# Altium PCB Oscilloscope_O.P.PcbDoc (part 1 of 2)
Units mm, origin at the board's own origin, x right, y up, seen from the top; angles counter-clockwise.
Board outline 97.16 x 92.08 mm, 4 copper layers (L1 (Sig), L2 (GND), L3 (GND), L4 (Sig)), stack 1.589 mm thick; 119 components, 103 nets, 464 pads, 437 vias.
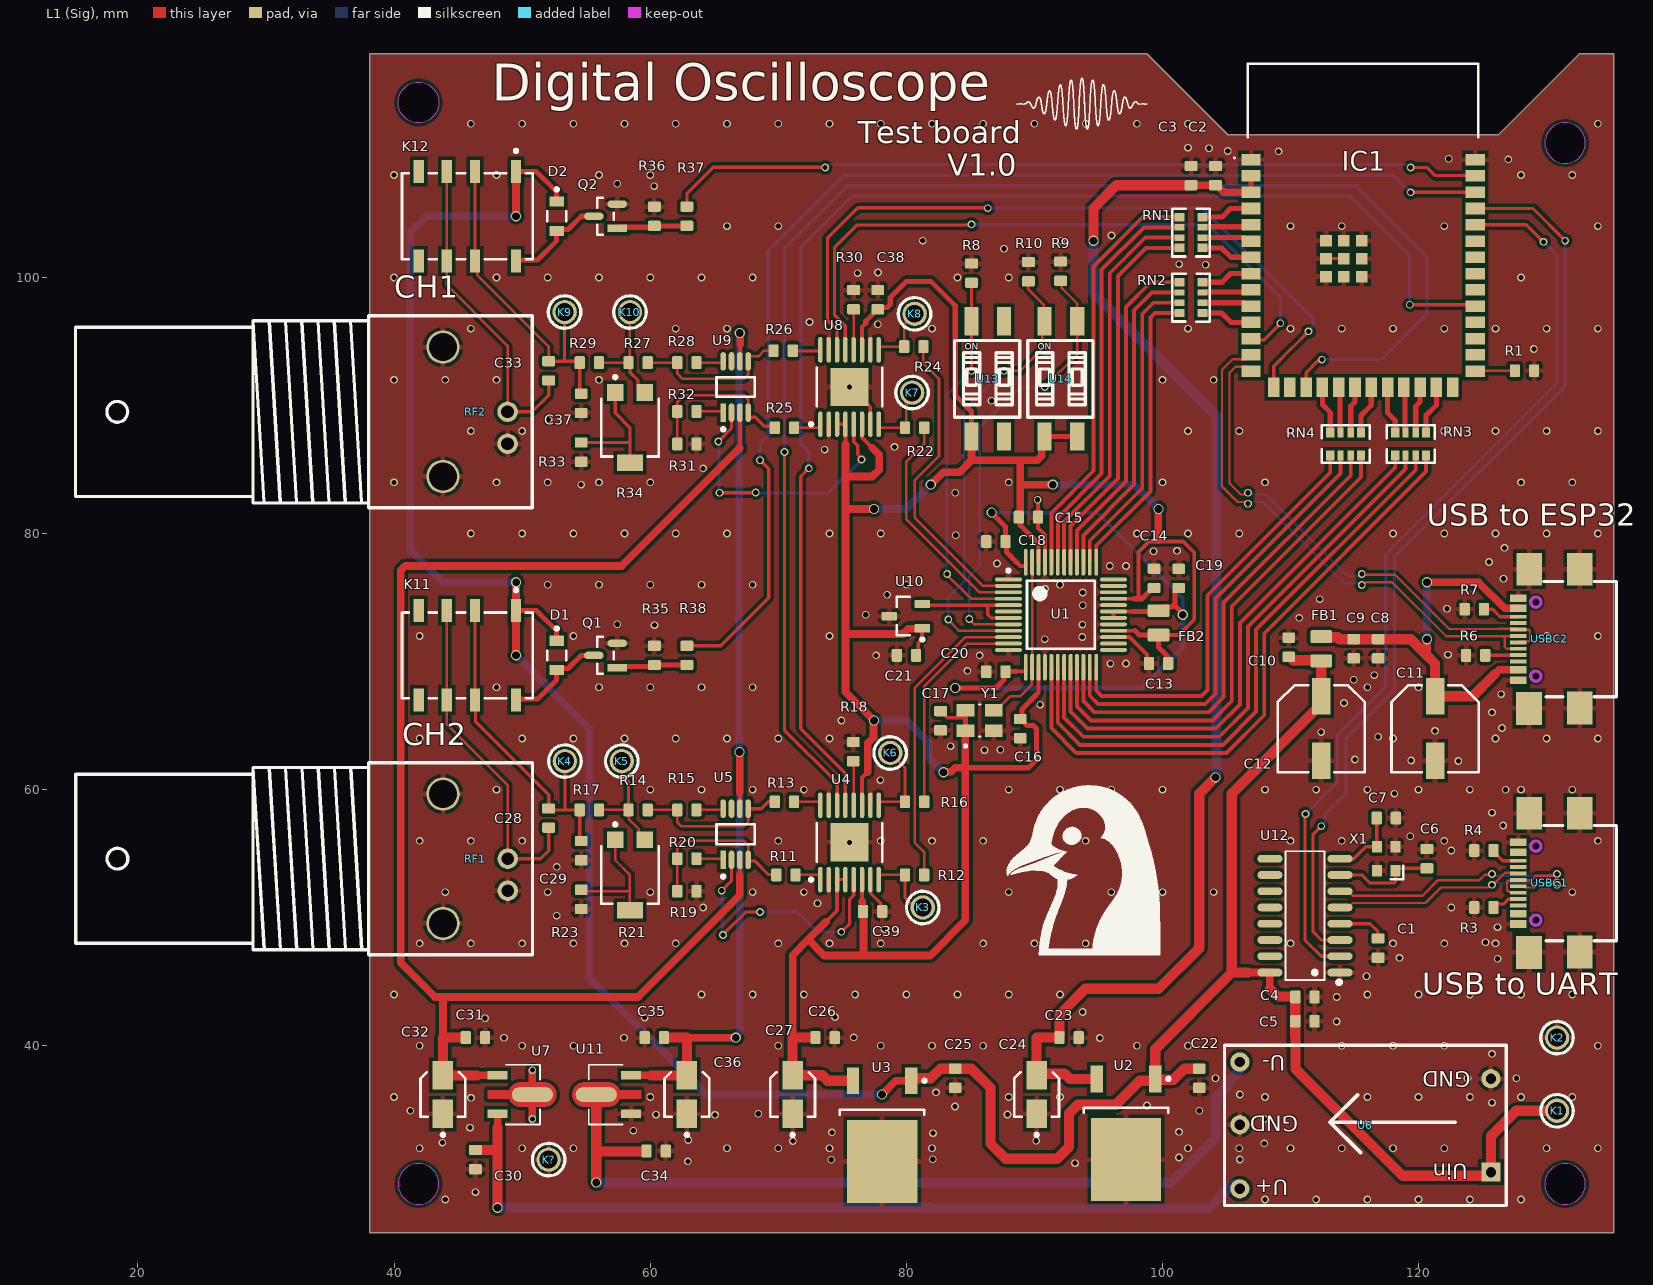
[diagram p0: L1 (Sig) view]
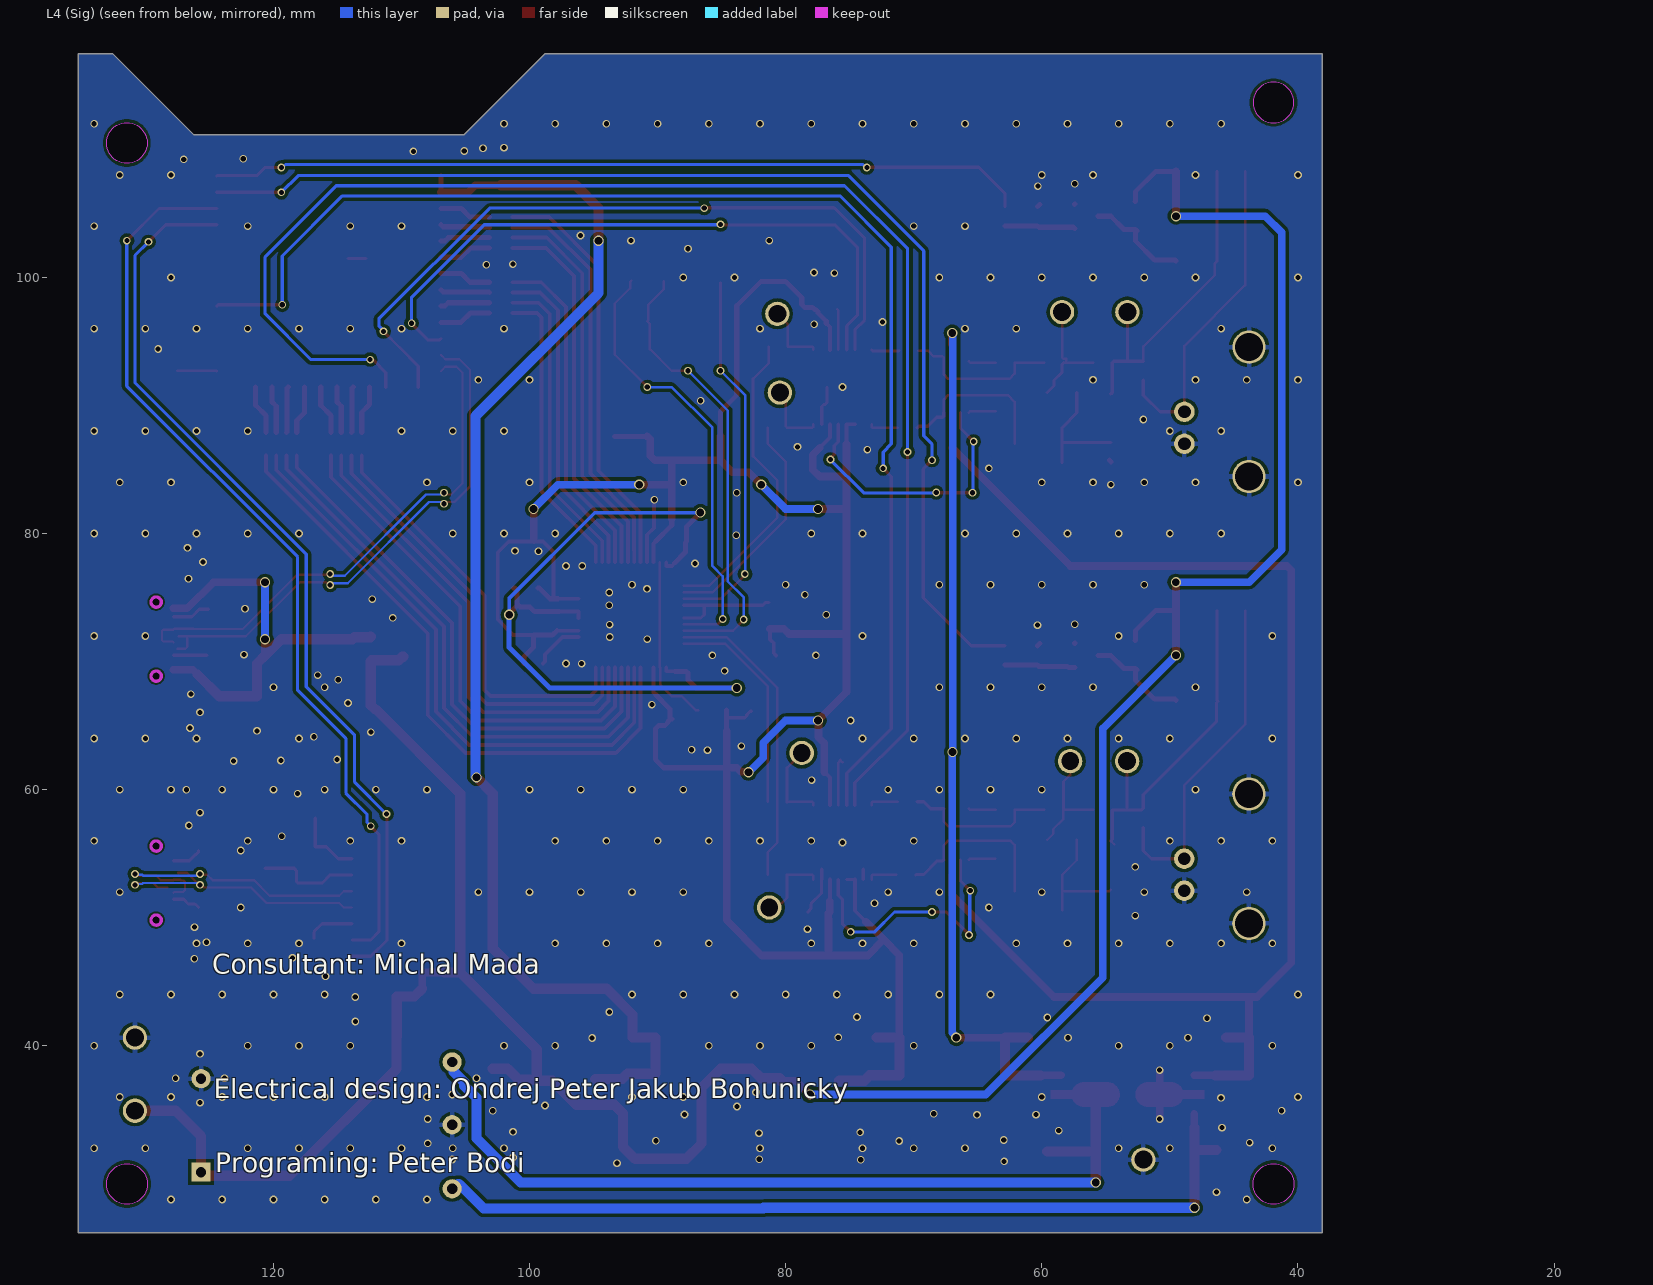
[diagram p1: L4 (Sig) view, seen from below]
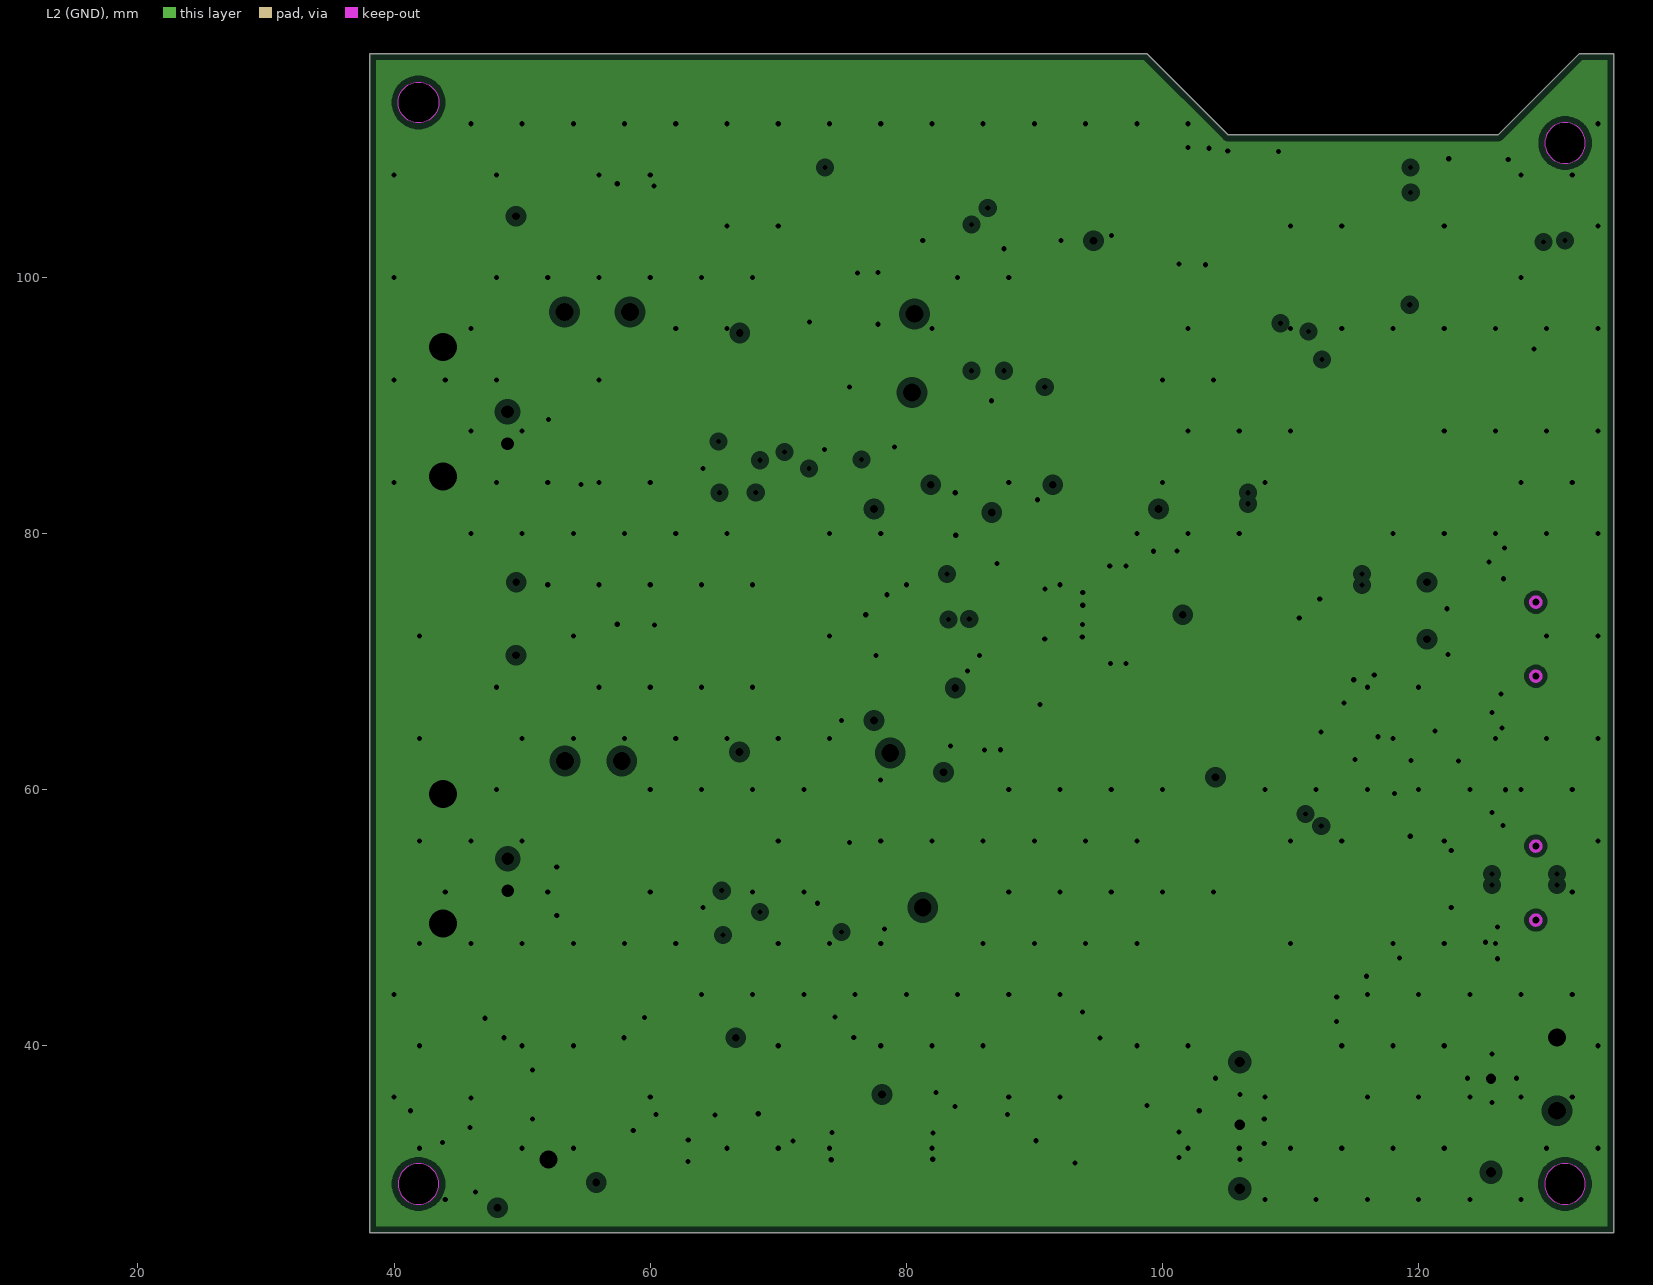
[diagram p2: L2 (GND), clearances drawn from the general rule]
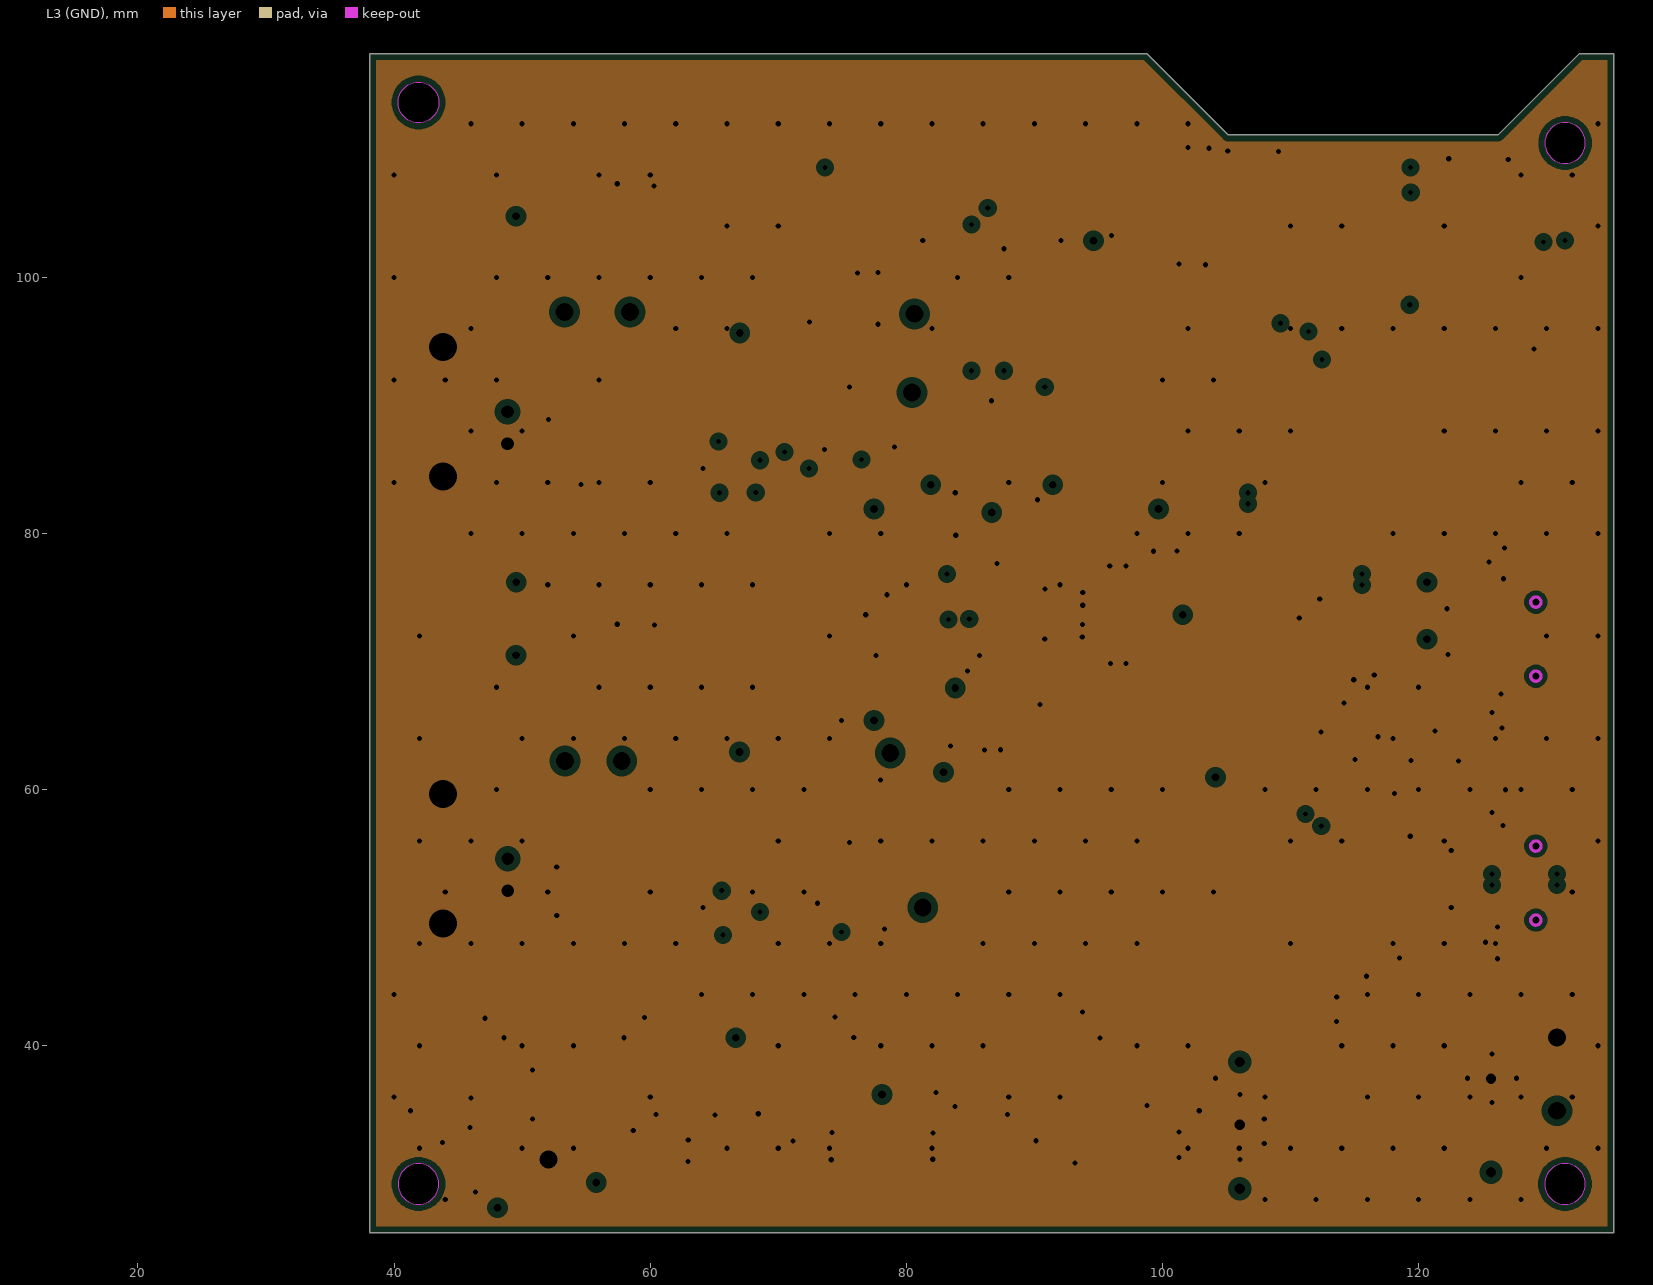
[diagram p3: L3 (GND), clearances drawn from the general rule]
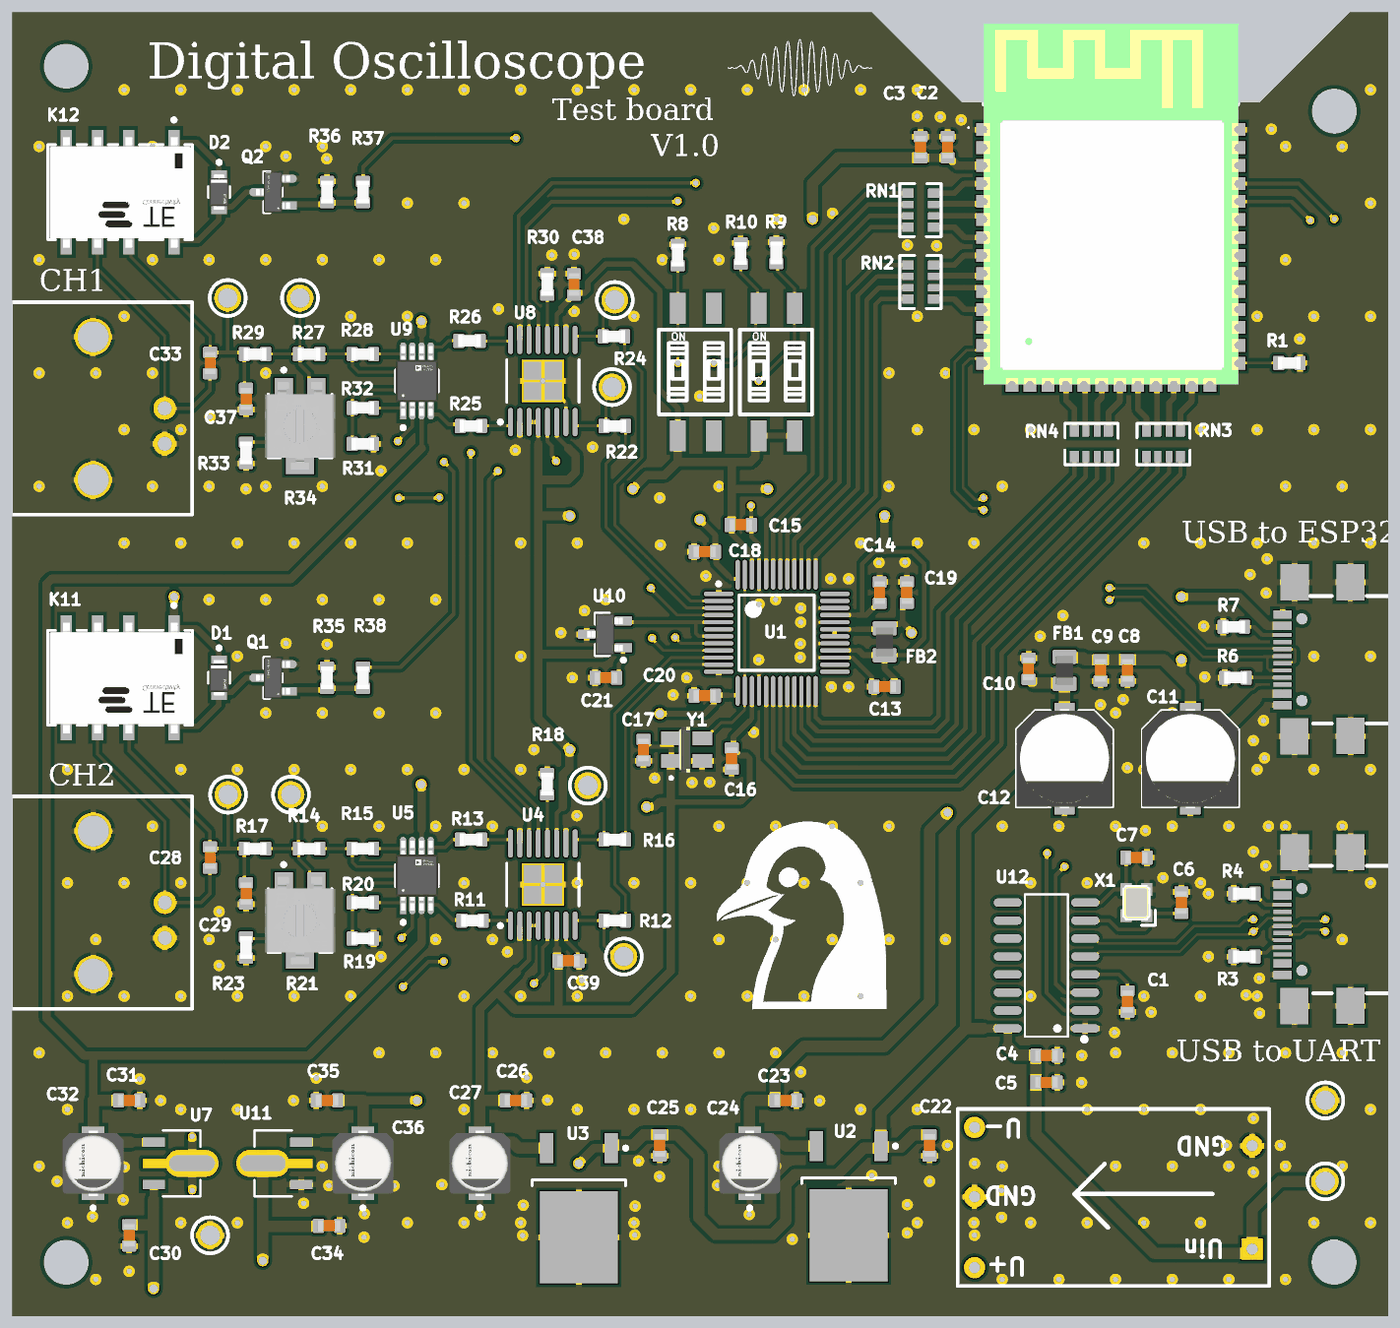
[diagram p5: 3D render of the assembled board from above, using the file's embedded part models]

## Layer stack, top to bottom
Top Solder: solder mask 0.0254, SM-001, Dk 4
L1 (Sig): signal copper 0.035
Dielectric 1: prepreg 0.1118, PP-015, Dk 4.3
L2 (GND): plane copper 0.0152, net GND
Dielectric 3: core 1.265, Core-039, Dk 4.8
L3 (GND): plane copper 0.0152, net GND
Dielectric 5: prepreg 0.1118, PP-015, Dk 4.3
L4 (Sig): signal copper 0.035
Bottom Solder: solder mask 0.0254, SM-001, Dk 4

## Board outline
38.1,25.4 38.1,117.475 98.781,117.475 105.131,111.125 126.211,111.125 132.561,117.475 135.255,117.475 135.255,25.4
cut-out: 129.84,29.213 ccw(c131.428,29.213) 131.428,27.625 ccw(c131.428,29.213) 133.017,29.213 ccw(c131.428,29.213) 131.428,30.802 ccw(c131.428,29.213)
cut-out: 40.322,29.21 ccw(c41.91,29.21) 41.91,27.622 ccw(c41.91,29.21) 43.498,29.21 ccw(c41.91,29.21) 41.91,30.798 ccw(c41.91,29.21)
cut-out: 129.857,110.49 ccw(c131.445,110.49) 131.445,108.902 ccw(c131.445,110.49) 133.033,110.49 ccw(c131.445,110.49) 131.445,112.078 ccw(c131.445,110.49)
cut-out: 41.91,112.077 cw(c41.91,113.665) 40.322,113.665 cw(c41.91,113.665) 41.91,115.253 cw(c41.91,113.665) 43.498,113.665 cw(c41.91,113.665)

## Design rules (kind name [scope] priority, off if disabled: settings)
Clearance [All] p1: gap=0.254 ignorepadtopadclearanceinfootprint=FALSE except(0.097: Arc-Arc Arc-Track Track-Track; 0.15: Arc-SMDPad Track-SMDPad SMDPad-SMDPad)
DiffPairsRouting [All] p1: maxlimit=0.4 minlimit=0.4 mostfreqgap=0.4 toplayer_minwidth=0.18 toplayer_maxwidth=0.18 toplayer_prefwidth=0.18 bottomlayer_minwidth=0.18 bottomlayer_maxwidth=0.18 bottomlayer_prefwidth=0.18 impedanceprofiledriven=TRUE impedanceprofileid={862D4C42-B263-4330-B03A-90D364C203AF} impedanceprofilevalue=90.000000 maxuncoupledlength=12.7
PlaneClearance [All] p1: clearance=0.508
PlaneConnect [All] p1: planeconnectstyle=Direct reliefexpansion=0.508 reliefentries=4 reliefconductorwidth=0.254 reliefairgap=0.254
PolygonConnect [All] p1: thpad.connectstyle=Relief thpad.reliefconductorwidth=0.4 thpad.reliefentries=4 thpad.polygonreliefangle="90 Angle" thpad.airgapwidth=0.254 smdpad.connectstyle=Relief smdpad.reliefconductorwidth=0.4 smdpad.reliefentries=4 smdpad.polygonreliefangle="90 Angle" smdpad.airgapwidth=0.254 via.connectstyle=Direct via.reliefconductorwidth=0.254 via.reliefentries=4 via.polygonreliefangle="90 Angle" via.airgapwidth=0.254
RoutingVias [All] p1: holewidth=0.4 width=0.6 viastyle="Through Hole" minholewidth=0.16 minwidth=0.1 maxholewidth=0.6 maxwidth=0.8
RoutingVias VPower [InNetClass('Power')] p2: holewidth=0.4 width=0.6 viastyle="Through Hole" minholewidth=0.3 minwidth=0.5 maxholewidth=0.6 maxwidth=0.8
SolderMaskExpansion [All] p1: expansion=0.102 istentingtop=FALSE
SupplyNets "Schematic Supply Nets_6" [InNet('+5V')] p1: voltage=0.000
SupplyNets "Schematic Supply Nets_5" [InNet('+3.3V')] p2: voltage=0.000
SupplyNets "Schematic Supply Nets_4" [InNet('-5V')] p3: voltage=0.000
SupplyNets "Schematic Supply Nets_3" [InNet('+5V_USB')] p4: voltage=0.000
SupplyNets "Schematic Supply Nets_2" [InNet('+3.3V_VD')] p5: voltage=0.000
SupplyNets "Schematic Supply Nets_1" [InNet('GND')] p6: voltage=0.000
SupplyNets "Schematic Supply Nets" [InNet('+3.3V_ESP')] p7: voltage=0.000
Width Nezajem [InNetClass('Nezajem')] p1: maxlimit=0.6 minlimit=0.2 preferedwidth=0.4
Width Digital [InNetClass('Digital')] p2: maxlimit=0.6 minlimit=0.2 preferedwidth=0.3
Width Power [InNetClass('Power')] p3: maxlimit=0.8 minlimit=0.3 preferedwidth=0.6
Width Analog [InNetClass('Analog')] p4: maxlimit=0.254 minlimit=0.1 preferedwidth=0.2
27 further rules are at their usual default settings.

## Classes and differential pairs
differential pair USB_ESP: +USB_ESP_P -USB_ESP_N
differential pair CON1_USB: +CON1_USB_P -CON1_USB_N

## Components (designator, comment, footprint, x,y, rotation, side; value= is the part's Value field where it differs from the comment)
C1 "100n" CAP_0603 116.84,47.625 r90 top
C2 "10u" CAP_0603 104.14,107.95 r90 top
C3 "100n" CAP_0603 102.235,107.95 r90 top
C4 "4.7u" CAP_0603 111.125,43.815 r0 top
C5 "100n" CAP_0603 111.125,41.91 r0 top
C6 "10p" CAP_0603 120.65,54.61 r90 top
C7 "10p" CAP_0603 117.475,57.785 r0 top
C8 "100n" CAP_0603 116.84,71.005 r90 top
C9 "2.2u" CAP_0603 114.935,71.005 r90 top
C10 "2.2u" CAP_0603 109.855,71.12 r270 top
C11 "UWX1C101MCL1GB" CAPAE7067X55L 121.285,64.77 r270 top
C12 "UWX1C101MCL1GB" CAPAE7067X55L 112.395,64.77 r270 top
C13 "100n" CAP_0603 99.695,69.85 r180 top
C14 "100n" CAP_0603 99.345,76.497 r90 top
C15 "100n" CAP_0603 89.535,81.28 r0 top
C16 "100n" CAP_0603 88.9,64.77 r270 top
C17 "100n" CAP_0603 82.67,65.383 r270 top
C18 "100n" CAP_0603 86.995,79.375 r180 top
C19 "100n" CAP_0603 101.267,76.497 r90 top
C20 "100n" CAP_0603 86.995,69.215 r180 top
C21 "100n" CAP_0603 80.01,70.485 r180 top
C22 "100n" CAP_0603 102.87,37.465 r270 top
C23 "2.2u" CAP_0603 92.71,40.64 r0 top
C24 "UWX1C100MCL2GB" FP-UWX1C100MCL2GB-MFG 90.17,36.195 r90 top
C25 "100n" CAP_0603 83.82,37.465 r270 top
C26 "2.2u" CAP_0603 73.66,40.64 r0 top
C27 "UWX1C100MCL2GB" FP-UWX1C100MCL2GB-MFG 71.12,36.195 r90 top
C28 "10n" CAP_0603 52.07,57.785 r270 top
C29 "15p" CAP_0603 54.61,55.245 r270 top
C30 "100n" CAP_0603 46.355,31.115 r270 top
C31 "100n" CAP_0603 46.355,40.64 r0 top
C32 "UWX1C100MCL2GB" FP-UWX1C100MCL2GB-MFG 43.815,36.195 r90 top
C33 "10n" CAP_0603 52.07,92.71 r270 top
C34 "100n" CAP_0603 60.47,31.782 r0 top
C35 "100n" CAP_0603 60.325,40.64 r180 top
C36 "UWX1C100MCL2GB" FP-UWX1C100MCL2GB-MFG 62.865,36.195 r90 top
C37 "15p" CAP_0603 54.61,90.17 r270 top
C38 "100n" CAP_0603 77.761,98.259 r270 top
C39 "100n" CAP_0603 77.37,50.486 r180 top
D1 "RRE02VTM4SFHTR" FP-TUMD2SM-MFG 52.705,70.485 r270 top
D2 "RRE02VTM4SFHTR" FP-TUMD2SM-MFG 52.705,104.775 r270 top
FB1 "FB0805" FB_0805 112.395,71.005 r270 top
FB2 "FB0805" FB_0805 99.695,73.025 r90 top
IC1 "ESP32-S3-WROOM-1-N8" ESP32S3WROOM1N8R2 115.67,103.93 r0 top
K1 "5001_C238122" TEST-TH_BD2.54-P1.39 130.81,34.925 r0 top
K2 "5001_C238122" TEST-TH_BD2.54-P1.39 130.81,40.64 r270 top
K3 "5001_C238122" TEST-TH_BD2.54-P1.39 81.28,50.8 r0 top
K4 "5001_C238122" TEST-TH_BD2.54-P1.39 53.34,62.23 r0 top
K5 "5001_C238122" TEST-TH_BD2.54-P1.39 57.785,62.23 r0 top
K6 "5001_C238122" TEST-TH_BD2.54-P1.39 78.74,62.865 r0 top
K7 "5001_C238122" TEST-TH_BD2.54-P1.39 80.45,91.009 r0 top
K8 "5001_C238122" TEST-TH_BD2.54-P1.39 80.645,97.155 r0 top
K9 "5001_C238122" TEST-TH_BD2.54-P1.39 53.315,97.296 r0 top
K10 "5001_C238122" TEST-TH_BD2.54-P1.39 58.42,97.296 r0 top
K11 "G6K-2F-Y-TR-DC5" FP-G6K-2F-Y-TR-DC5-MFG 45.72,70.485 r180 top
K12 "G6K-2F-Y-TR-DC5" FP-G6K-2F-Y-TR-DC5-MFG 45.72,104.775 r180 top
K? "5001_C238122" TEST-TH_BD2.54-P1.39 52.07,31.115 r0 top
Q1 "3400" FP-318-08-IPC_B 56.515,70.485 r180 top
Q2 "3400" FP-318-08-IPC_B 56.515,104.775 r180 top
R1 "10k" RES_0603 128.27,92.71 r180 top
R3 "5.1K" RES_0603 125.095,50.8 r180 top
R4 "5.1K" RES_0603 125.095,55.245 r180 top
R6 "5.1K" RES_0603 124.46,70.485 r180 top
R7 "5.1K" RES_0603 124.348,74.082 r180 top
R8 "10k" RES_0603 85.09,100.33 r270 top
R9 "10k" RES_0603 92.047,100.485 r270 top
R10 "10K" RES_0603 89.535,100.445 r270 top
R11 "100R" RES_0603 70.6,53.34 r0 top
R12 "100R" RES_0603 80.645,53.34 r0 top
R13 "100R" RES_0603 70.485,59.055 r0 top
R14 "470R" RES_0603 59.055,58.42 r180 top
R15 "470R" RES_0603 62.865,58.42 r180 top
R16 "100R" RES_0603 80.645,59.055 r0 top
R17 "900k" RES_0603 55.245,58.42 r180 top
R18 "470R" RES_0603 75.863,62.969 r270 top
R19 "470R" RES_0603 62.865,52.07 r0 top
R20 "470R" RES_0603 62.865,54.61 r180 top
R21 "3314G-1-502E" BOUR-3314G-1_V 58.42,53.34 r0 top
R22 "100R" RES_0603 80.645,88.265 r0 top
R23 "68k" RES_0603 54.61,51.435 r270 top
R24 "100R" RES_0603 80.582,94.595 r0 top
R25 "100R" RES_0603 70.485,88.265 r0 top
R26 "100R" RES_0603 70.384,94.279 r0 top
R27 "470R" RES_0603 59.055,93.345 r180 top
R28 "470R" RES_0603 62.865,93.345 r180 top
R29 "900k" RES_0603 55.245,93.345 r180 top
R30 "470R" RES_0603 75.879,98.259 r270 top
R31 "470R" RES_0603 62.865,86.995 r0 top
R32 "470R" RES_0603 62.865,89.535 r180 top
R33 "3314G-1-502E" BOUR-3314G-1_V 58.42,88.265 r0 top
R34 "68k" RES_0603 54.61,86.36 r270 top
R35 "47k" RES_0603 60.325,70.485 r90 top
R36 "47k" RES_0603 60.325,104.775 r90 top
R37 "470R" RES_0603 62.865,104.775 r270 top
R38 "470R" RES_0603 62.865,70.485 r270 top
RF1 "KH-BNC50-3511" ANT-TH_KH-BNC50-3511 46.355,54.61 r270 top
RF2 "KH-BNC50-3511" ANT-TH_KH-BNC50-3511 46.34,89.505 r270 top
RN1 "4D03WGJ0221T5E" RES-ARRAY-SMD_0603-8P-L3.2-W1.6-BL 102.235,103.505 r90 top value=220Ω
RN2 "4D03WGJ0221T5E" RES-ARRAY-SMD_0603-8P-L3.2-W1.6-BL 102.235,98.425 r90 top value=220Ω
RN3 "4D03WGJ0221T5E" RES-ARRAY-SMD_0603-8P-L3.2-W1.6-BL 119.38,86.995 r180 top value=220Ω
RN4 "4D03WGJ0221T5E" RES-ARRAY-SMD_0603-8P-L3.2-W1.6-BL 114.3,86.995 r180 top value=220Ω
U1 "AD9288BSTZ-100" ST-48_M 92.075,73.66 r0 top
U2 "LF33CDT-TR" TO-252_N 97.155,33.165 r270 top
U3 "LF33CDT-TR" TO-252_N 78.105,33.02 r270 top
U4 "AD8370AREZ" ADI-RE-16-2_M 75.565,55.88 r90 top
U5 "AD8138ARMZ" FP-RM-8-IPC_C 66.675,56.515 r90 top
U6 "DC-DC_boost-5-12V" Dip 126.845,40.035 r180 top
U7 "78L05_C112446" SOT-89-3_L4.5-W2.5-P1.50-LS4.2-BR 49.444,36.195 r180 top
U8 "AD8370AREZ" ADI-RE-16-2_M 75.565,91.44 r90 top
U9 "AD8138ARMZ" FP-RM-8-IPC_C 66.675,91.44 r90 top
U10 "REF3012AIDBZR" DBZ0003A_M 79.955,73.548 r180 top
U11 "79L05_C122849" SOT-89-3_L4.5-W2.5-P1.50-LS4.2-BR 57.15,36.195 r0 top
U12 "CH340G" SOIC-16_L9.9-W3.9-P1.27-LS6.0-BL 111.125,50.165 r90 top
U13 "DO-02PT" SW-SMD_4P-L6.0-W5.1-P2.54-LS9.3-BL 86.36,92.075 r0 top
U14 "DO-02PT" SW-SMD_4P-L6.0-W5.1-P2.54-LS9.3-BL 92.075,92.075 r0 top
USBC1 "TYPEC-304YSSW-ACP16" USB-SMD_TYPEC-304YSSW-ACP16 130.175,52.705 r90 top
USBC2 "TYPEC-304YSSW-ACP16" USB-SMD_TYPEC-304YSSW-ACP16 130.175,71.755 r90 top
X1 "12MHz" XTAL_2520 117.475,54.61 r90 top
Y1 "100MHz" OT2EL89CJI-111YLC 85.725,65.405 r90 top

## Footprints (in the part's own frame and the unit in brackets; to place one, negate y for a bottom-side part, rotate by r counter-clockwise, add the part's x,y. Pads: shape width x height; smd on the part's side, far side on the other; paste and mask are expansions set on the pad)
ADI-RE-16-2_M [mm] "TSOP, 16-Leads, Body 5x4.4mm, Pitch 0.65mm, Thermal Pad, IPC Low Density"
  oval 2x0.35 smd: 1(-2.9,2.275) 2(-2.9,1.625) 3(-2.9,0.975) 4(-2.9,0.325) 5(-2.9,-0.325) 6(-2.9,-0.975) 7(-2.9,-1.625) 8(-2.9,-2.275) 9(2.9,-2.275) 10(2.9,-1.625) 11(2.9,-0.975) 12(2.9,-0.325) 13(2.9,0.325) 14(2.9,0.975) 15(2.9,1.625) 16(2.9,2.275)
  rect 3x3 smd paste-1.5: 17(0,0)
  silkscreen extent -3.02,-2.55 1.5,3.12, body extent -2.25,-2.55 2.25,2.55, height 1.2
ANT-TH_KH-BNC50-3511 [mm]
  round 1.6 hole 1 paste-2539.97 mask+0.05: 1(0,2.525) 2(2.5,2.525)
  round 2.601 hole 2.2 paste-2539.97 mask+0.05: 3(5.05,-2.525) 4(-5.05,-2.525)
  silkscreen extent -7.49,-31.21 7.49,4.46
BOUR-3314G-1_V [mm] "SMD, 3-Leads, Body 4.5x4.5mm, Pitch 1.15mm"
  rect 1.3x1.3 smd: 1(-1.15,2.75) 3(1.15,2.75)
  rect 2x1.3 smd: 2(0,-2.75)
  silkscreen extent -2.25,-2.25 2.25,4.07, body extent -2.5,-3.1 2.5,3.1, height 2.73
CAP_0603 [mm]
  rrect25% 0.8x1 smd: 1(-0.75,0) 2(0.75,0)
  body extent -0.8,-0.4 0.8,0.4, height 0.51
CAPAE7067X55L [mm] "Aluminum Electrolytic Capacitor, Body 6.80x6.80x5.50mm, IPC High Density"
  rect 2.85x1.45 smd: 1(-2.525,0) 2(2.525,0)
  silkscreen extent -3.4,-3.4 3.4,3.4, body extent -3.5,-3.4 3.5,3.4, height 5.5
DBZ0003A_M [mm] "SOT23, 3-Leads, Body 3.04x1.4mm, Pitch 0.95mm, IPC Low Density"
  rrect15% 1.2x0.65 smd: 1(-1.3,0.95) 2(-1.3,-0.95) 3(1.3,0)
  silkscreen extent -1.43,-1.5 0.7,1.95, body extent -1.26,-1.46 1.26,1.46, height 0.96
Dip [mm]
  rect 1.5x1.5 hole 0.8: 1(1.199,9.9)
  round 1.5 hole 0.8: 2(1.2,2.6) 3(20.8,11.2) 4(20.8,6.2) 5(20.8,1.3)
  silkscreen extent 0,0 22,12.5
ESP32S3WROOM1N8R2 [mm]
  rect 1.5x0.9 smd: 1(-8.75,5.26) 2(-8.75,3.99) 3(-8.75,2.72) 4(-8.75,1.45) 5(-8.75,0.18) 6(-8.75,-1.09) 7(-8.75,-2.36) 8(-8.75,-3.63) 9(-8.75,-4.9) 10(-8.75,-6.17) 11(-8.75,-7.44) 12(-8.75,-8.71) 13(-8.75,-9.98) 14(-8.75,-11.25) 27(8.75,-11.25) 28(8.75,-9.98) 29(8.75,-8.71) 30(8.75,-7.44) 31(8.75,-6.17) 32(8.75,-4.9) 33(8.75,-3.63) 34(8.75,-2.36) 35(8.75,-1.09) 36(8.75,0.18) 37(8.75,1.45) 38(8.75,2.72) 39(8.75,3.99) 40(8.75,5.26)
  rect 0.9x1.5 smd: 15(-6.985,-12.5) 16(-5.715,-12.5) 17(-4.445,-12.5) 18(-3.175,-12.5) 19(-1.905,-12.5) 20(-0.635,-12.5) 21(0.635,-12.5) 22(1.905,-12.5) 23(3.175,-12.5) 24(4.445,-12.5) 25(5.715,-12.5) 26(6.985,-12.5)
  rect 0.9x0.9 smd: 41(-1.5,-2.46) 42(-1.5,-1.06) 43(-2.9,-1.06) 44(-2.9,-2.46) 45(-2.9,-3.86) 46(-1.5,-3.86) 47(-0.1,-3.86) 48(-0.1,-2.46) 49(-0.1,-1.06)
  silkscreen extent -10.1,5.35 9,12.75, body extent -9,-12.75 9,12.75, height 2.7
FB_0805 [mm]
  rrect25% 1x1.7 smd: 1(-0.95,0) 2(0.95,0)
  body extent -1,-0.63 1,0.63, height 0.86
FP-318-08-IPC_B [mm]
  rect 1.524x0.578 smd paste+0 mask+0: 1(-0.91,0.95)
  rrect100% 1.524x0.578 smd paste+0 mask+0: 2(-0.91,-0.95) 3(0.91,0)
  silkscreen extent -0.65,-1.45 0.65,1.45, body extent -1.92,-1.7 1.92,1.7, height 0.25
FP-G6K-2F-Y-TR-DC5-MFG [mm]
  rect 0.8x1.8 smd paste+0 mask+0: 1(-3.8,-3.5) 2(-0.6,-3.5) 3(1.6,-3.5) 4(3.8,-3.5) 5(3.8,3.5) 6(1.6,3.5) 7(-0.6,3.5) 8(-3.8,3.5)
  silkscreen extent -5.1,-5.22 5.1,3.35, body extent -5.2,-4.5 5.2,4.5, height 0.25
FP-RM-8-IPC_C [mm]
  rect 1.454x0.436 smd paste+0 mask+0: 1(-2,0.975)
  rrect100% 1.454x0.436 smd paste+0 mask+0: 2(-2,0.325) 3(-2,-0.325) 4(-2,-0.975) 5(2,-0.975) 6(2,-0.325) 7(2,0.325) 8(2,0.975)
  silkscreen extent -3.43,-1.5 0.77,1.5, body extent -2.83,-1.6 2.83,1.6, height 0.25
FP-TUMD2SM-MFG [mm]
  rect 0.8x1.1 smd paste+0 mask+0: 1(-1.15,0) 2(1.15,0)
  silkscreen extent -2.22,-0.75 0.38,0.75, body extent -1.65,-0.85 1.65,0.85, height 0.25
FP-UWX1C100MCL2GB-MFG [mm]
  rect 2.2x1.6 smd paste+0 mask+0: 1(-1.5,0) 2(1.5,0)
  silkscreen extent -3.27,-1.75 1.75,1.75, body extent -2.85,-2 2.85,2, height 0.25
OT2EL89CJI-111YLC [mm]
  rect 1x1.4 smd: 1(-0.8,1.1) 2(-0.8,-1.1) 3(0.8,-1.1) 4(0.8,1.1)
  silkscreen extent -2.1,-0.08 1.25,1.2, body extent -1.6,-0.25 1.6,0.55, height 1.25
RES-ARRAY-SMD_0603-8P-L3.2-W1.6-BL [mm]
  rect 0.65x0.8 smd paste+0 mask+0.051: 1(-1.2,-0.9) 4(1.2,-0.9) 5(1.2,0.9) 8(-1.2,0.9)
  rect 0.5x0.8 smd paste+0 mask+0.051: 2(-0.4,-0.9) 3(0.4,-0.9) 6(0.4,0.9) 7(-0.4,0.9)
  silkscreen extent -1.87,-1.45 1.87,1.47
RES_0603 [mm]
  rrect25% 0.8x1 smd: 1(-0.75,0) 2(0.75,0)
  body extent -0.8,-0.43 0.8,0.43, height 0.52
SOIC-16_L9.9-W3.9-P1.27-LS6.0-BL [mm]
  oval 0.602x1.971 smd paste+0 mask+0.051: 1(-4.445,-2.736) 2(-3.175,-2.736) 3(-1.905,-2.736) 4(-0.635,-2.736) 5(0.635,-2.736) 6(1.905,-2.736) 7(3.175,-2.736) 8(4.445,-2.736) 9(4.445,2.736) 10(3.175,2.736) 11(1.905,2.736) 12(0.635,2.736) 13(-0.635,2.736) 14(-1.905,2.736) 15(-3.175,2.736) 16(-4.445,2.736)
  silkscreen extent -5.36,-2.82 5.03,1.52
SOT-89-3_L4.5-W2.5-P1.50-LS4.2-BR [mm]
  rect 1.575x0.672 smd paste+0 mask+0.051: 1(1.356,-1.5) 3(1.356,1.5)
  oval 3.226x1.14 smd: 2(-1.356,0)
  L1 (Sig) region: -2.283,0.95 -0.429,0.95 -0.384,0.949 -0.34,0.946 -0.296,0.94 -0.252,0.933 -0.208,0.924 -0.165,0.912 -0.123,0.899 -0.081,0.884 -0.04,0.866 0,0.847 0.04,0.826 0.078,0.803 0.115,0.779 0.151,0.752 0.185,0.724 0.219,0.695 0.251,0.664 0.281,0.631 0.31,0.597 0.337,0.562 0.362,0.525 0.386,0.488 0.408,0.449 0.428,0.409 0.447,0.33 2.144,0.33 2.144,-0.33 0.447,-0.33 0.428,-0.409 0.408,-0.449 0.386,-0.488 0.362,-0.526 0.337,-0.562 0.31,-0.597 0.281,-0.631 0.251,-0.664 0.219,-0.695 0.185,-0.725 0.151,-0.753 0.115,-0.779 0.078,-0.804 0.04,-0.827 0,-0.848 -0.04,-0.867 -0.081,-0.884 -0.123,-0.899 -0.165,-0.913 -0.208,-0.924 -0.252,-0.934 -0.296,-0.941 -0.34,-0.946 -0.384,-0.949 -0.429,-0.95 -2.283,-0.95 -2.328,-0.949 -2.372,-0.946 -2.416,-0.941 -2.46,-0.934 -2.504,-0.924 -2.547,-0.913 -2.589,-0.899 -2.631,-0.884 -2.672,-0.867 -2.713,-0.848 -2.752,-0.827 -2.79,-0.804 -2.827,-0.779 -2.863,-0.753 -2.898,-0.725 -2.931,-0.695 -2.963,-0.664 -2.993,-0.631 -3.022,-0.597 -3.049,-0.562 -3.075,-0.526 -3.098,-0.488 -3.12,-0.449 -3.141,-0.409 -3.159,-0.369 -3.175,-0.327 -3.189,-0.285 -3.202,-0.242 -3.212,-0.199 -3.22,-0.155 -3.227,-0.111 -3.231,-0.067 -3.233,-0.022 -3.233,0.022 -3.231,0.067 -3.227,0.111 -3.22,0.155 -3.212,0.199 -3.202,0.242 -3.189,0.285 -3.175,0.327 -3.159,0.369 -3.141,0.409 -3.12,0.449 -3.098,0.488 -3.075,0.525 -3.049,0.562 -3.022,0.597 -2.993,0.631 -2.963,0.664 -2.931,0.695 -2.898,0.724 -2.863,0.752 -2.827,0.779 -2.79,0.803 -2.752,0.826 -2.713,0.847 -2.672,0.866 -2.631,0.884 -2.589,0.899 -2.547,0.912 -2.504,0.924 -2.46,0.933 -2.416,0.94 -2.372,0.946 -2.328,0.949 -2.283,0.95
  silkscreen extent -1.95,-2.33 0.7,2.33
ST-48_M [mm] "Thin QFP, 48-Leads, Body 7x7mm, Pitch 0.5mm, IPC Low Density"
  oval 2.1x0.3 smd: 1(-4.1,2.75) 2(-4.1,2.25) 3(-4.1,1.75) 4(-4.1,1.25) 5(-4.1,0.75) 6(-4.1,0.25) 7(-4.1,-0.25) 8(-4.1,-0.75) 9(-4.1,-1.25) 10(-4.1,-1.75) 11(-4.1,-2.25) 12(-4.1,-2.75) 25(4.1,-2.75) 26(4.1,-2.25) 27(4.1,-1.75) 28(4.1,-1.25) 29(4.1,-0.75) 30(4.1,-0.25) 31(4.1,0.25) 32(4.1,0.75) 33(4.1,1.25) 34(4.1,1.75) 35(4.1,2.25) 36(4.1,2.75)
  oval 0.3x2.1 smd: 13(-2.75,-4.1) 14(-2.25,-4.1) 15(-1.75,-4.1) 16(-1.25,-4.1) 17(-0.75,-4.1) 18(-0.25,-4.1) 19(0.25,-4.1) 20(0.75,-4.1) 21(1.25,-4.1) 22(1.75,-4.1) 23(2.25,-4.1) 24(2.75,-4.1) 37(2.75,4.1) 38(2.25,4.1) 39(1.75,4.1) 40(1.25,4.1) 41(0.75,4.1) 42(0.25,4.1) 43(-0.25,4.1) 44(-0.75,4.1) 45(-1.25,4.1) 46(-1.75,4.1) 47(-2.25,4.1) 48(-2.75,4.1)
  silkscreen extent -4.22,-2.65 2.65,3.57, body extent -3.5,-3.5 3.5,3.5, height 1.6
SW-SMD_4P-L6.0-W5.1-P2.54-LS9.3-BL [mm]
  rect 1.1x2.2 smd paste+0 mask+0.05: 1(-1.27,-4.5) 2(1.27,-4.5) 3(1.27,4.5) 4(-1.27,4.5)
  silkscreen extent -2.6,-3 2.5,3
TEST-TH_BD2.54-P1.39 [mm]
  round 1.9 hole 1.39 paste-2539.97 mask+0.051: 1(0,0)
  silkscreen extent -1.27,-1.27 1.27,1.27
TO-252_N [mm] "D-PAK, 4-Leads, Body 6.1x6.5mm, Pitch 2.28mm, Lead Span 9.7mm, IPC Medium Density"
  rect 2.1x0.95 smd: 1(-4.25,2.28) 3(-4.25,-2.28)
  rect 6.5x5.5 smd: 4(2.05,0)
  silkscreen extent -4.37,-3.3 -1.6,3.43, body extent -2,-3.3 4.2,3.3, height 2.4
USB-SMD_TYPEC-304YSSW-ACP16 [mm]
  rect 2.559x2 smd paste+0 mask+0.05: 13(-5.409,1.552) 14(5.461,1.524) 15(-5.385,-2.409) 16(5.461,-2.413)
  rect 0.6x1.3 smd paste+0 mask+0.05: A1B12(-3.2,2.38) A4B9(-2.4,2.38) B1A12(3.2,2.38) B4A9(2.4,2.38)
  rect 0.3x1.3 smd paste+0 mask+0.05: A5(-1.25,2.38) A6(-0.25,2.38) A7(0.25,2.38) A8(1.25,2.38) B5(1.75,2.38) B6(0.75,2.38) B7(-0.75,2.38) B8(-1.75,2.38)
  Keep-Out Layer board cut-out: -2.49,1.02 -2.49,1.099 -2.551,1.246 -2.663,1.359 -2.81,1.42 -2.97,1.42 -3.117,1.359 -3.229,1.246 -3.29,1.099 -3.29,1.02 -3.29,0.94 -3.229,0.793 -3.116,0.681 -2.969,0.62 -2.81,0.62 -2.663,0.681 -2.551,0.793 -2.49,0.94 -2.49,1.02 -2.49,1.02
  Keep-Out Layer board cut-out: 3.29,1.02 3.29,1.099 3.229,1.246 3.116,1.359 2.969,1.42 2.81,1.42 2.663,1.359 2.551,1.246 2.49,1.099 2.49,1.02 2.49,0.94 2.551,0.793 2.663,0.681 2.81,0.62 2.969,0.62 3.116,0.681 3.229,0.793 3.29,0.94 3.29,1.02 3.29,1.02
  Multi-Layer keep-out circle w0.254: c-2.89,1.02 r0.4
  Multi-Layer keep-out circle w0.254: c2.89,1.02 r0.4
  silkscreen extent -4.5,-5.27 4.5,0.43
XTAL_2520 [mm]
  rrect10% 0.9x0.8 smd mask+0: 1(-0.925,-0.725) 2(0.925,-0.725) 3(0.925,0.725) 4(-0.925,0.725)
  silkscreen extent -1.6,-1.33 -0.54,-0.36, body extent -1.25,-1 1.25,1, height 0.8

## Part data
C1 C2 C3 C4 C5 C6 C7 C8 C9 C10 C13 C14 C15 C16 C17 C18 C19 C20 C21 C22 C23 C25 C26 C28 C29 C30 C31 C33 C34 C35 C37 C38 C39: library part CMP-001-00085-1, "Capacitor SMD 0603", Design Item ID=CAP_0603, Source=Schematic-Lib-PhilsLab.SchLib
C11 C12: library part CMP-2000-07374-1, "Aluminum Electrolytic Capacitor, 100 uF, +/- 20%, 16 V, -40 to 85 degC, 2-Pin SMD, RoHS, Tape and Reel", Capacitance=100µF, Case Size/Dimension=Ø6.3x5.4mm, Manufacturer=Nichicon, Operating Temp-Max=85°C, Package Description="2-Pin Surface Mount Device, Body 6.6 x 6.6 mm", Package Reference=CAPAE7067X55, Rated Voltage=16V, Datasheet URL=http://nichicon-us.com/english/products/pdfs/e-uwx.pdf, Datasheet Version=08/2015, Manufacturer URL=http://www.nichicon.co.jp/english/, Mounting Technology=SurfaceMount, Type=Can
C24 C27 C32 C36: library part CMP-00267-00203106-1, "UWX1C100MCL2GB WX Series 10 uF 16 V 85°C Ø3 x 5.4 mm SMT Chip Aluminum Electrolytic Cap", Capacitance=10µF, Case/Package=SMD/SMT, Dielectric Material=Aluminium, Leakage Current=3µA, Max Operating Temperature=85°C, Min Operating Temperature=-40°C, Ripple Current=18mA, Tolerance=20%, Voltage=16V, Diameter=3mm, Dissipation Factor=19%, Features="General Purpose", Height=5.4mm, Height - Seated (Max)=2.9972mm, Lead Diameter=800µm, Lead Free="Lead Free", Lead Pitch=800µm, Length=5.4mm, Life (Hours)=2000hours, Mount="Surface Mount", NexarPartId=203106, Number of Pins=2, Packaging="Cut Tape", Radiation Hardening=No, REACH SVHC="No SVHC", Ripple Current (AC)=18mA, RoHS=Compliant, Schedule B="8532220020, 8532220020", Termination=SMD/SMT, Voltage Rating=16V, Voltage Rating (AC)=16V, Voltage Rating (DC)=16V, Width=3.3mm
D1 D2: library part CMP-00574-71466012-1, "RRE02VTM4SFHTR Rectifier Diode 400V 0.2A Automotive AEC-Q101 2-Pin TUMD-SM T/R", Forward Current=200mA, Forward Voltage=1.1V, Max Forward Surge Current (Ifsm)=1A, Max Operating Temperature=150°C, Max Repetitive Reverse Voltage (Vrrm)=400V, Element Configuration=Single, Lifecycle Status=Production, Mount="Surface Mount", NexarPartId=71466012, Number of Pins=2, Number of Terminals=2, Packaging="Cut Tape", REACH SVHC=Unknown, RoHS=Non-Compliant
FB1 FB2: library part FB_0805, "Ferrite Bead SMD 0805"
IC1: "Integrated Circuit", Manufacturer_Name="Espressif Systems", Mouser Part Number=356-ESP32-S3WROOM1N8, Datasheet Link=https://www.espressif.com/sites/default/files/documentation/esp32-s3-wroom-1_wroom-1u_datasheet_en.pdf, Height=3.25mm, Manufacturer_Part_Number=ESP32-S3-WROOM-1-N8, Mouser Price/Stock=https://www.mouser.co.uk/ProductDetail/Espressif-Systems/ESP32-S3-WROOM-1-N8?qs=Wj%2FVkw3K%252BMC1mq0KGPvoSQ%3D%3D
K1 K2 K3 K4 K5 K6 K7 K8 K9 K10 K?: JLCPCB Part Class="Extended Part", LCSC Part Name=5001, Manufacturer=Keystone, Add into BOM=yes, Convert to PCB=yes, Datasheet=https://atta.szlcsc.com/upload/public/pdf/source/20211115/64B944F8418AA2CF0680BB1B201435FB.pdf, Device=5001_C238122, Manufacturer Part=5001, Supplier=LCSC, Supplier Footprint=-, Supplier Part=C238122, Symbol=5001
K11 K12: library part CMP-08823-000003-1, "RELAY TELECOM DPDT 1A 5VDC", Ambient Temperature Range High=+70°C, Ambient Temperature Range Low=-40°C, Coil Current=21.1mA, Coil Power=100mW, Coil Resistance=237Ω, Coil Voltage=5V, Current Rating=2A, Manufacturer=Omron, Switching Current=1A, Temperature="-40°C to +70°C", Automotive=No, Category=Relay, Coil Type=Non-Latching, ComponentLink2Description=Datasheet, ComponentLink2URL=https://omronfs.omron.com/en_US/ecb/products/pdf/en-g6k.pdf, Device Class L1=Electromechanical, Device Class L2=Relays, Device Class L3="Signal Relays", Digikey Description="RELAY TELECOM DPDT 1A 5VDC", Height=5.4mm, Lead Free=Yes, Manufacturer Part Number=G6K-2F-Y-TR-DC5, Mouser Description="Electromechanical Relay DPDT 1A 5VDC 237Ohm Surface Mount", Number Of Contacts=2, Octopart=https://octopart.com/g6k-2f-y-tr-dc5-omron-697853, Package=G6K-2F-Y-TR-DC5, RoHS=TRUE, Standoff Height=0.3mm, Temperature Range High=+70°C, Temperature Range Low=-40°C, Throw Configuration=DPDT
Q1 Q2: library part CMP-07173-000101-1, "MOSFET N-CH 50V 220MA SOT-23", Case/Package=SOT-23, Continuous Drain Current (ID)=220mA, Drain to Source Breakdown Voltage=50V, Drain to Source Resistance=3.5R, Gate to Source Voltage (Vgs)=20V, Input Capacitance=27pF, Max Operating Temperature=150°C, Max Power Dissipation=360mW, Min Operating Temperature=-55°C, On-State Resistance=6R, Package Quantity=1, Threshold Voltage=1.3V, Contact Plating=Tin, Current Rating=220mA, Drain to Source Voltage (Vdss)=50V, Dual Supply Voltage=50V, Element Configuration=Single, Fall Time=9ns, Height=0.93mm, Lead Free="Lead Free", Length=2.92mm, Mount="Surface Mount", Nominal Vgs=1.3V, Number of Elements=1, Number of Pins=3, Packaging="Tape and Reel", Power Dissipation=360mW, Radiation Hardening=No, Rds On Max=3.5R, REACH SVHC="No SVHC", Rise Time=9ns, Termination=SMD/SMT, Turn-Off Delay Time=20ns, Turn-On Delay Time=2.5ns, Voltage Rating (DC)=50V, Weight=0.03g, Width=1.3mm
R1 R3 R4 R6 R7 R8 R9 R10 R11 R12 R13 R14 R15 R16 R17 R18 R19 R20 R22 R23 R24 R25 R26 R27 R28 R29 R30 R31 R32 R34 R35 R36 R37 R38: library part RES_0603, "Resistor SMD 0603"
R21 R33: library part CMP-2000-05589-1, "4 mm Square Trimpot(R) Trimming Potentiometer, 5 KOhm, +/- 20%, 0.25 W, -55 to 125 degC, 3-Pin SMD, RoHS, Tape and Reel", Dielectric strength=500, Manufacturer=Bourns, Package=GullWing, Package Description="3-Pin Surface Mount Device, Body 4.5 x 4.5 mm, Pitch 1.15 mm", Package Reference=3314G-1, Power=250, Resistance=5, Temperature range=-55...+125°C, Tolerance=±20%, Angle of rotation=240°, Curve=linear, Datasheet URL=http://www.bourns.com/docs/Product-Datasheets/3314.pdf, Datasheet Version=05/2016, Manufacturer URL=http://www.bourns.com/, Mounting Technology=SurfaceMount
RN1 RN2 RN3 RN4: JLCPCB Part Class="Extended Part", LCSC Part Name="220Ω ±5% 0603x4", Manufacturer=UNI-ROYAL(厚声), Temperature Coefficient=±200ppm/℃, Tolerance=±5%, Add into BOM=yes, Convert to PCB=yes, Datasheet=https://atta.szlcsc.com/upload/public/pdf/source/20191224/C474318_2527498AE30E813171187CCD28401A71.pdf, Device=4D03WGJ0221T5E, Manufacturer Part=4D03WGJ0221T5E, Supplier=LCSC, Supplier Footprint=0603x4, Supplier Part=C29719, Symbol=4D03WGJ0221T5E
U1: library part CMP-0313-02377-2, "Dual 8-Bit Analog-to-Digital Converter with Parallel Interface, 100MSPS, -40 to +85 degC, ST-48, Pb-Free, Tray", Generic Part Number=AD9288-100, Manufacturer="Analog Devices", Channels=2, ComponentLink1Description="Manufacturer URL", ComponentLink1URL=http://www.analog.com/en/index.html, ComponentLink2Description=Datasheet, ComponentLink2URL=http://www.analog.com/static/imported-files/data_sheets/AD9288.pdf, ComponentLink3Description="Package Specification", ComponentLink3URL=http://www.analog.com/static/imported-files/packages/PKG_PDF/LQFP%28ST%29/ST_48.pdf, ComponentLink4Description="Product URL", ComponentLink4URL=http://www.analog.com/en/analog-to-digital-converters/ad-converters/ad9288/products/product.html, DatasheetVersion=Rev.C, Interface=Par, Mounting Technology="Surface Mount", PackageDescription="48-Pin Thin Quad Flat Pack 0.5 mm Pitch", PackageReference=ST-48, PackageVersion=revA, Packing=Tray, PartNumber=AD9288BSTZ-100, Resolution (Bits)=8, RoHS=Y, Throughput Rate (SPS)=100M
U2 U3: library part CMP-0244-00069-1, "500mA, Very Low Drop (0.45V) Voltage Regulator, 3.3V, 3-Pin DPAK, Tape and Reel", ComponentLink1Description="Manufacturer URL", ComponentLink1URL=http://www.st.com, ComponentLink2Description=Datasheet, ComponentLink2URL=http://www.st.com/internet/com/TECHNICAL_RESOURCES/TECHNICAL_LITERATURE/DATASHEET/CD00000546.pdf, DatasheetVersion=1/11/2010, PackageDescription="3-Pin Transistor Outline Package 2.28 mm Pitch, 9.7 mm Lead Span (DPAK)", PackageReference=TO-252, PackageVersion=2011
U4 U8: library part CMP-0291-00034-1, "LF to 750 MHz, Digitally Controlled VGA, 34dB, 5.5V, 78mA, RE-16-2, Pb-Free, 96 Tube", Supply Voltage (V)=5.5V, -3 dB BW=750MHz, Code_JEDEC=MO-153-ABT, ComponentLink1Description="Manufacturer URL", ComponentLink1URL=www.analog.com, ComponentLink2Description=Datasheet, ComponentLink2URL=http://www.analog.com/static/imported-files/data_sheets/AD8370.pdf, ComponentLink3Description="Package Specification", ComponentLink3URL=http://www.analog.com/static/imported-files/packages/PKG_PDF/TSSOP_EP(RE)/RE_16_2.pdf, DatasheetVersion="Rev. B", Distortion (2nd)=65dBc, Distortion (3rd)=62dBc, Gain=34dB, Noise Figure=7.4dB, Output IP3=31dBm, PackageDescription="16-Lead Thin Shrink Small Outline With Exposed Pad [TSSOP_EP]", PackageReference=RE-16-2, PackageVersion=050806-A, Spectral Noise=2.1(nV/rtHz)
U5 U9: library part CMP-09114-000004-1, "IC ADC DRIVER 8MSOP", Input Bias Current=3.5uA, Input Offset Voltage=1V, Manufacturer="Analog Devices", Max Dual Supply Voltage=5.5V, Max Junction Temp=+150°C, Max Supply Voltage=11V, Min Dual Supply Voltage=1.4V, Min Supply Voltage=2.7V, Nominal Supply Current=20mA, Output Current Per Channel=95mA, Package=RM-8, Temperature="-40°C to +85°C", Temperature Range High=+85°C, Temperature Range Low=-40°C, Voltage Gain=0.001V/mV, Automotive=No, Category=IC, ComponentLink2Description=Datasheet, ComponentLink2URL=https://www.analog.com/media/en/technical-documentation/data-sheets/AD8138.pdf, Device Class L1="Integrated Circuits (ICs)", Device Class L2="Linear ICs", Device Class L3=unset, Digikey Description="IC ADC DRIVER 8MSOP", Footprint Url=https://www.analog.com/media/en/package-pcb-resources/package/pkg_pdf/msoprm/rm_8.pdf, Gain Bandwidth=320MHz, Height=1.1mm, Ipc Land Pattern Name=SOP65P490X110-8, Lead Free=Yes, Manufacturer Part Number=AD8138ARMZ, Mouser Description="Differential Amplifiers IC Lo-Distortion ADC", Number Of Channels=1, Octopart=https://octopart.com/ad8138armz-analog+devices-136159, RoHS=TRUE, Standoff Height=0.05mm
U7: Dropout Voltage=1.7V@(40mA), JLCPCB Part Class="Extended Part", LCSC Part Name="输入35V 输出5V 150mA", Manufacturer=SHIKUES(时科), Manufacturer Part=78L05, MAX Output Current=150mA, Maximum Input Voltage=35V, Output Voltage=5V, Power Supply Rejection Ratio (PSRR)=49dB@(120Hz), Add into BOM=yes, Convert to PCB=yes, Datasheet=https://atta.szlcsc.com/upload/public/pdf/source/20170721/C122848_1500622633164834592.pdf, Device=78L05_C112446, Number of Outputs=1, Output Polarity="Positive electrode", Supplier=LCSC, Supplier Footprint=SOT-89-3, Supplier Part=C112446, Symbol=78L05
U10: library part CMP-0367-00192-2, "1.25 V, 50 ppm / degC, 50 uA Series (Bandgap) Voltage Reference, -40 to 125 degC, 3-pin SOT-23 (DBZ), Green (RoHS & no Sb/Br)", Manufacturer="Texas Instruments", Rating=Catalog, Temp Coeff(Max)(ppm/ degree C)=50, Temp Coeff(Typ)(ppm/ degree C)=20, Code_JEDEC=TO-236, ComponentLink1Description="Manufacturer URL", ComponentLink1URL=http://www.ti.com/, ComponentLink2Description=Datasheet, ComponentLink2URL=http://www.ti.com/general/docs/lit/getliterature.tsp?genericPartNumber=REF3012&fileType=pdf, ComponentLink3Description="Package Specification", ComponentLink3URL=http://www.ti.com/litv/pdf/mpds108a, DatasheetVersion=SBVS032F, Eco-Plan="Green (RoHS & no Sb/Br)", Initial Accuracy @ 25/deg C(%)=0.2, Iq(Max)(uA)=50, Mounting Technology="Surface Mount", PackageDescription="3-Pin Plastic Small Outline, Body 2.92 x 1.3 mm, Pitch 0.95 mm", PackageReference=DBZ0003A, PackageVersion=4203227/B, PartNumber=REF3012AIDBZR, SubFamily="Series Voltage Reference", VI(Max)(V)=5.5, VI(Min)(V)=1.8, VO(V)=1.25
U11: Dropout Voltage=1.7V@(40mA), JLCPCB Part Class="Extended Part", LCSC Part Name="输入35V 输出5V 150mA", Manufacturer=SHIKUES(时科), Manufacturer Part=79L05, MAX Output Current=150mA, Maximum Input Voltage=35V, Output Voltage=5V, Power Supply Rejection Ratio (PSRR)=49dB@(120Hz), Add into BOM=yes, Convert to PCB=yes, Datasheet=https://atta.szlcsc.com/upload/public/pdf/source/20180625/C122890_584C137742CBBDB4CE2BEC6B637E5E74.pdf, Device=79L05_C122849, Number of Outputs=1, Output Polarity="Negative electrode", Supplier=LCSC, Supplier Footprint=SOT-89-3, Supplier Part=C122849, Symbol=79L05
U12: JLCPCB Part Class="Extended Part", LCSC Part Name="USB转串口芯片 CH340", Manufacturer=WCH(南京沁恒), Supply Voltage=3.3V；5V, Add into BOM=yes, Applications Function=Transceiver, Convert to PCB=yes, Data Rate=2Mbps, Datasheet=https://atta.szlcsc.com/upload/public/pdf/source/20230530/6E401E9554E9F5311886CC8B3F89B62E.pdf, Device=CH340G, Manufacturer Part=CH340G, Supplier=LCSC, Supplier Footprint=SOP-16, Supplier Part=C14267, Symbol=CH340G
U13 U14: Color=Black, Current Rating=25mA, JLCPCB Part Class="Extended Part", LCSC Part Name="2.54mm间距 2位贴片高柄 双排IC型贴片 拨码开关", Manufacturer=HANBO(汉博), Operating Life="3000 Times", Operating Temperature=-40℃~+85℃, Voltage Rating=24V, Add into BOM=yes, Circuit=SPST, Convert to PCB=yes, Datasheet=https://atta.szlcsc.com/upload/public/pdf/source/20230921/A585A1A9C96A17CB5999FCF006429FA9.pdf, Device=DO-02PT, Lead Pitch=2.54mm, Manufacturer Part=DO-02PT, Number of Positions="2 positions", Supplier=LCSC, Supplier Footprint=SMD,P=2.54mm, Supplier Part=C18198115, Symbol=DO-02PT, Type="Flat Toggle, Raised Style"
USBC1 USBC2: Current Rating - Power (Max)=5A, JLCPCB Part Class="Extended Part", LCSC Part Name="Type-C 母 卧贴", Manufacturer=XUNPU(讯普), Operating Temperature Range=-25℃~+85℃, Soldering Temperature(Max)=260℃, Add into BOM=yes, Connector Type=Type-C, Contact Material=-, Contact Plating=-, Convert to PCB=yes, Datasheet=https://atta.szlcsc.com/upload/public/pdf/source/20210615/C2840392_E4D6700BD82FA37F52F4054C59437243.pdf, Device=TYPEC-304YSSW-ACP16, Gender=Female, Manufacturer Part=TYPEC-304YSSW-ACP16, Mounting Style=卧贴, Number Of Contacts=16P, Number of Ports=1, Standard="USB 3.1", Supplier=LCSC, Supplier Footprint=SMD, Supplier Part=C2840392, Symbol=TYPEC-304YSSW-ACP16
X1: library part XTAL_2520, "Crystal SMD 2520"
Y1: library part OT2EL89CJI-111YLC, Package=None, Availability=Unavailable, MP=ASEDV-12.000MHZ-LC, Price=None

## Via types
v1: diameter 0.6, hole 0.4, L1 (Sig) to L4 (Sig), 415 vias
v2: diameter 0.8, hole 0.6, L1 (Sig) to L4 (Sig), 22 vias

## Nets (pads, with @x,y where several pads share a name; then routed paths per layer and width w, separated by ;. In a path a pad name is that pad's centre, name@x,y a point inside that pad or via, vN(x,y) a via of type N, cw(c..) or ccw(c..) an arc to the next point about the centre after c; other vN are vias at no path point)
+3.3V: C13.1 C14.1 C15.1 C16.1 C17.1 C21.1 C26.1 C27.2 C38.2 C39.2 FB2.1 U1.15 U1.28 U1.33 U1.46 U3.3 U4.3 U4.4 U4.6 U4.11 U8.3 U8.4 U8.6 U8.11 U10.1 U13.1 U14.1 U14.2 Y1.1 Y1.4 | length 229.3
  L1 (Sig) w0.254: U4.3@74.59,52.98 U4.4@75.24,52.98 ; C17.1@82.67,66.133 82.77,66.133 83.043,65.86 83.043,65.761 83.192,65.612 84.549,65.612 84.622,65.684 84.625,65.688 Y1.4@84.625,66.205
  L1 (Sig) w0.3: 73.728,49.686 74.59,50.548 U4.3@74.59,52.98 ; U8.3@74.59,88.54 U8.4@75.24,88.54 75.24,86.989 75.245,86.984 ; 76.54,51.3 U4.6@76.54,52.98 ; U4.11@76.54,58.78 76.55,58.79 76.55,60.944 76.976,61.371 ; U8.6@76.54,88.54 76.55,88.53 76.55,87.49 77.351,86.689 ; U8.11@76.54,94.34 76.54,96.125 76.834,96.419 ; C21.1@80.76,70.485 80.926,70.651 80.926,71.435 81.23,71.739 U10.1@81.23,72.573 ; 90.167,67.424 90.322,67.579 90.322,68.657 90.325,68.66 U1.15@90.325,69.557 ; 90.17,79.375 90.325,79.22 U1.46@90.325,77.76 ; U1.28@96.175,72.41 97.867,72.41 ; U1.33@96.175,74.91 97.8,74.91 ; 98.117,74.925 98.117,78.545 98.947,79.375 101.625,79.375 102.486,78.513 102.486,73.276 101.285,72.075 FB2.1@99.695,72.075
  L1 (Sig) w0.4: 76.834,96.419 76.834,96.581 77.461,97.209 77.461,97.309 77.661,97.509 C38.2@77.761,97.509 77.907,97.654 78.506,97.654 78.74,97.888 78.74,98.425 80.01,99.695 81.915,99.695 83.82,97.79 83.82,90.805 85.09,89.535 U13.1@85.09,87.575 ; 84.604,61.709 89.532,61.709 90.167,62.344 90.167,64.765 89.932,64.999 89.434,64.999 89.2,65.234 89.2,65.32 89,65.52 C16.1@88.9,65.52 ; Y1.1@84.622,64.608 84.622,65.684 Y1.4@84.622,66.202 ; C16.1@88.897,65.523 89.026,65.653 89.026,66.284 90.167,67.424 ; C15.1@88.9,81.165 88.9,80.645 90.17,79.375 ; U14.1@90.805,87.575 U14.2@93.345,87.575 ; 97.801,74.91 98.408,74.91 99.245,75.747 C14.1@99.345,75.747 ; 97.867,72.41 98.202,72.075 FB2.1@99.695,72.075 99.695,71.12 100.445,70.37 C13.1@100.445,69.85
  L1 (Sig) w0.6: 71.12,40.64 71.12,47.078 72.346,48.304 ; 73.728,49.686 72.346,48.304 ; 75.245,86.984 75.245,84.455 75.245,82.121 ; 75.27,84.455 77.349,84.455 77.877,84.983 77.877,86.162 77.351,86.689 ; C39.2@76.56,50.446 76.56,51.28 ; C39.2@76.667,50.346 76.667,49.929 76.657,49.918 76.657,47.048 ; 76.976,61.371 76.976,63.641 77.44,64.105 77.44,65.375 v2(77.47,65.405) 75.245,67.63 75.245,72.154 ; v2(77.47,81.915) 75.451,81.915 75.245,82.121 ; U10.1@81.23,72.573 80.155,72.573 79.736,72.154 75.245,72.154 ; v2(81.915,83.82) 82.887,84.792 84.157,84.792 85.09,85.725 ; v2(82.897,61.363) 82.931,61.397 83.502,61.397 83.815,61.709 84.604,61.709 ; Y1.1@84.604,64.584 84.604,61.709 ; U13.1@85.09,87.575 85.09,85.725 ; C15.1@88.885,81.165 88.885,81.797 88.9,81.812 88.9,83.82 ; U14.1@90.805,87.575 90.581,87.351 90.581,86.076 90.229,85.725 88.9,85.725 ; v2(91.44,83.82) 88.9,83.82 ; 99.675,79.491 v2@99.675,81.895 ; 72.346,48.304 73.602,47.048 76.657,47.048 ; 75.245,72.154 75.245,82.121 ; 76.657,47.048 81.855,47.048 84.604,49.796 84.604,61.709 ; 85.09,85.725 88.9,85.725 ; 88.9,83.82 88.9,85.725
  L1 (Sig) w0.8: C26.1@72.91,40.64 71.12,40.64 C27.2@71.12,37.695 73.43,37.695 73.855,37.27 U3.3@75.825,37.27
  L4 (Sig) w0.6: v2(77.47,65.405) 80.01,65.405 81.752,63.663 81.752,62.508 v2(82.897,61.363) ; v2(77.47,81.915) 80.01,81.915 v2(81.915,83.82) ; v2(91.44,83.82) 97.79,83.82 v2(99.695,81.915)
+3.3V_ESP: C2.1 C3.1 C23.1 C24.2 IC1.2 IC1.3 U2.3 | length 101.2
  L1 (Sig) w0.4: IC1.3@106.92,106.665 IC1.2@106.92,107.92
  L1 (Sig) w0.6: C3.1@102.235,107.2 C2.1@104.14,107.2 104.24,107.2 104.79,106.65 IC1.3@106.92,106.65
  L1 (Sig) w0.8: C24.2@90.17,37.815 90.17,40.64 C23.1@91.96,40.64 91.96,42.43 93.98,44.45 99.695,44.45 102.87,47.625 102.87,59.69 v2(104.14,60.96) ; C24.2@90.191,37.815 92.36,37.815 92.76,37.415 U2.3@94.875,37.415 ; v2(94.615,102.87) 94.615,105.41 96.405,107.2 C3.1@102.235,107.2
  L4 (Sig) w0.8: v2(94.615,102.87) 94.615,98.778 104.211,89.183 104.211,61.031 v2(104.14,60.96)
+3.3V_VD: C18.1 C19.1 C20.1 FB2.2 U1.13 U1.30 U1.31 U1.48 | length 61.1
  L1 (Sig) w0.3: 88.638,69.25 89.325,69.25 U1.13@89.325,69.56 ; 88.673,77.681 88.884,77.47 89.325,77.47 U1.48@89.325,77.76 ; U1.30@96.175,73.41 U1.31@96.175,73.91 97.685,73.91 97.691,73.904
  L1 (Sig) w0.4: v2(83.82,67.945) 86.995,67.945 87.63,68.58 87.63,69.1 C20.1@87.745,69.215 ; v2(86.659,81.644) 86.659,81.616 87.745,80.53 C18.1@87.745,79.375 87.815,79.305 87.815,78.555 88.681,77.689 ; C20.1@87.77,69.24 88.629,69.24 ; 97.691,73.904 99.624,73.904 FB2.2@99.695,73.975 99.985,74.265 100.731,74.265 100.965,74.499 ; C19.1@101.267,75.747 101.167,75.747 100.965,75.546 100.965,74.499 ; v2(101.59,73.655) 101.59,73.763 100.965,74.388 100.965,74.499
  L4 (Sig) w0.3: v2@86.659,81.618 94.912,81.618 101.59,74.94 v2(101.59,73.655)
  L4 (Sig) w0.4: v2(83.82,67.945) 98.425,67.945 101.59,71.11 v2(101.59,73.655)
+5V: C31.1 C32.2 U5.3 U7.1 U9.3 | length 109.6
  L1 (Sig) w0.3: 66.993,53.336 67,53.343 U5.3@67,54.515 ; 67,86.685 U9.3@67,89.44
  L1 (Sig) w0.6: 43.815,40.64 43.815,43.815 ; 46.474,37.693 U7.1@48.085,37.693 ; 66.993,53.336 66.993,51.753 59.055,43.815 43.815,43.815 ; 67,86.685 57.785,77.47 40.872,77.47 40.521,77.119 40.521,46.474 43.18,43.815 43.815,43.815
  L1 (Sig) w0.8: C32.2@43.815,37.68 46.462,37.68 ; C32.2@43.815,37.695 43.815,40.64 C31.1@45.605,40.64
+5V_USB: C4.1 C5.1 C10.2 C12.1 C22.1 C25.1 D1.1 D2.1 FB1.2 K1.1 K11.1 K12.1 U2.1 U3.1 U6.1 U12.16 | length 231.4
  L1 (Sig) w0.4: K11.1@49.52,73.985 51.11,73.985 52.694,72.401 52.694,71.646 D1.1@52.705,71.635 ; K12.1@49.52,108.275 51.11,108.275 52.694,106.691 52.694,105.936 D2.1@52.705,105.925
  L1 (Sig) w0.6: v2(49.52,70.495) K11.1@49.52,73.985 49.525,73.99 49.525,76.195 v2(49.53,76.2) ; v2(49.52,104.785) K12.1@49.52,108.275 ; v2(78.105,36.195) 79.18,37.27 U3.1@80.385,37.27 ; 106.68,45.72 U12.16@108.389,45.72 108.389,44.45
  L1 (Sig) w0.8: U3.1@80.385,37.27 80.385,37.39 80.46,37.465 81.915,37.465 82.665,38.215 C25.1@83.82,38.215 85.076,38.215 86.571,36.72 86.571,32.367 87.76,31.178 91.774,31.178 92.71,32.114 92.71,34.728 93.388,35.405 96.365,35.405 98.229,37.269 99.36,37.269 99.435,37.344 U2.1@99.435,37.415 99.435,39.745 105.41,45.72 ; U2.1@99.51,37.347 100.847,37.347 101.715,38.215 C22.1@102.87,38.215 ; 106.68,45.72 105.41,45.72 ; 108.389,44.45 108.992,43.847 C4.1@110.375,43.847 ; C10.2@109.855,70.37 109.955,70.37 110.219,70.106 FB1.2@112.344,70.106 ; C4.1@110.375,43.815 C5.1@110.375,41.91 110.375,40.755 110.38,40.75 110.38,38.21 118.745,29.845 125.356,29.845 U6.1@125.646,30.135 125.646,32.936 127.635,34.925 K1.1@130.81,34.925 ; FB1.2@112.395,70.055 C12.1@112.395,67.295 112.395,66.595 112.07,66.27 111.99,66.27 105.41,59.69 105.41,45.72
  L4 (Sig) w0.6: v2(49.52,70.495) 55.245,64.77 55.245,45.328 64.378,36.195 v2(78.105,36.195) ; v2(49.52,104.785) 42.555,104.785 41.275,103.505 41.275,78.74 43.815,76.2 v2(49.53,76.2)